# Allegro board Power_Transformer.brd
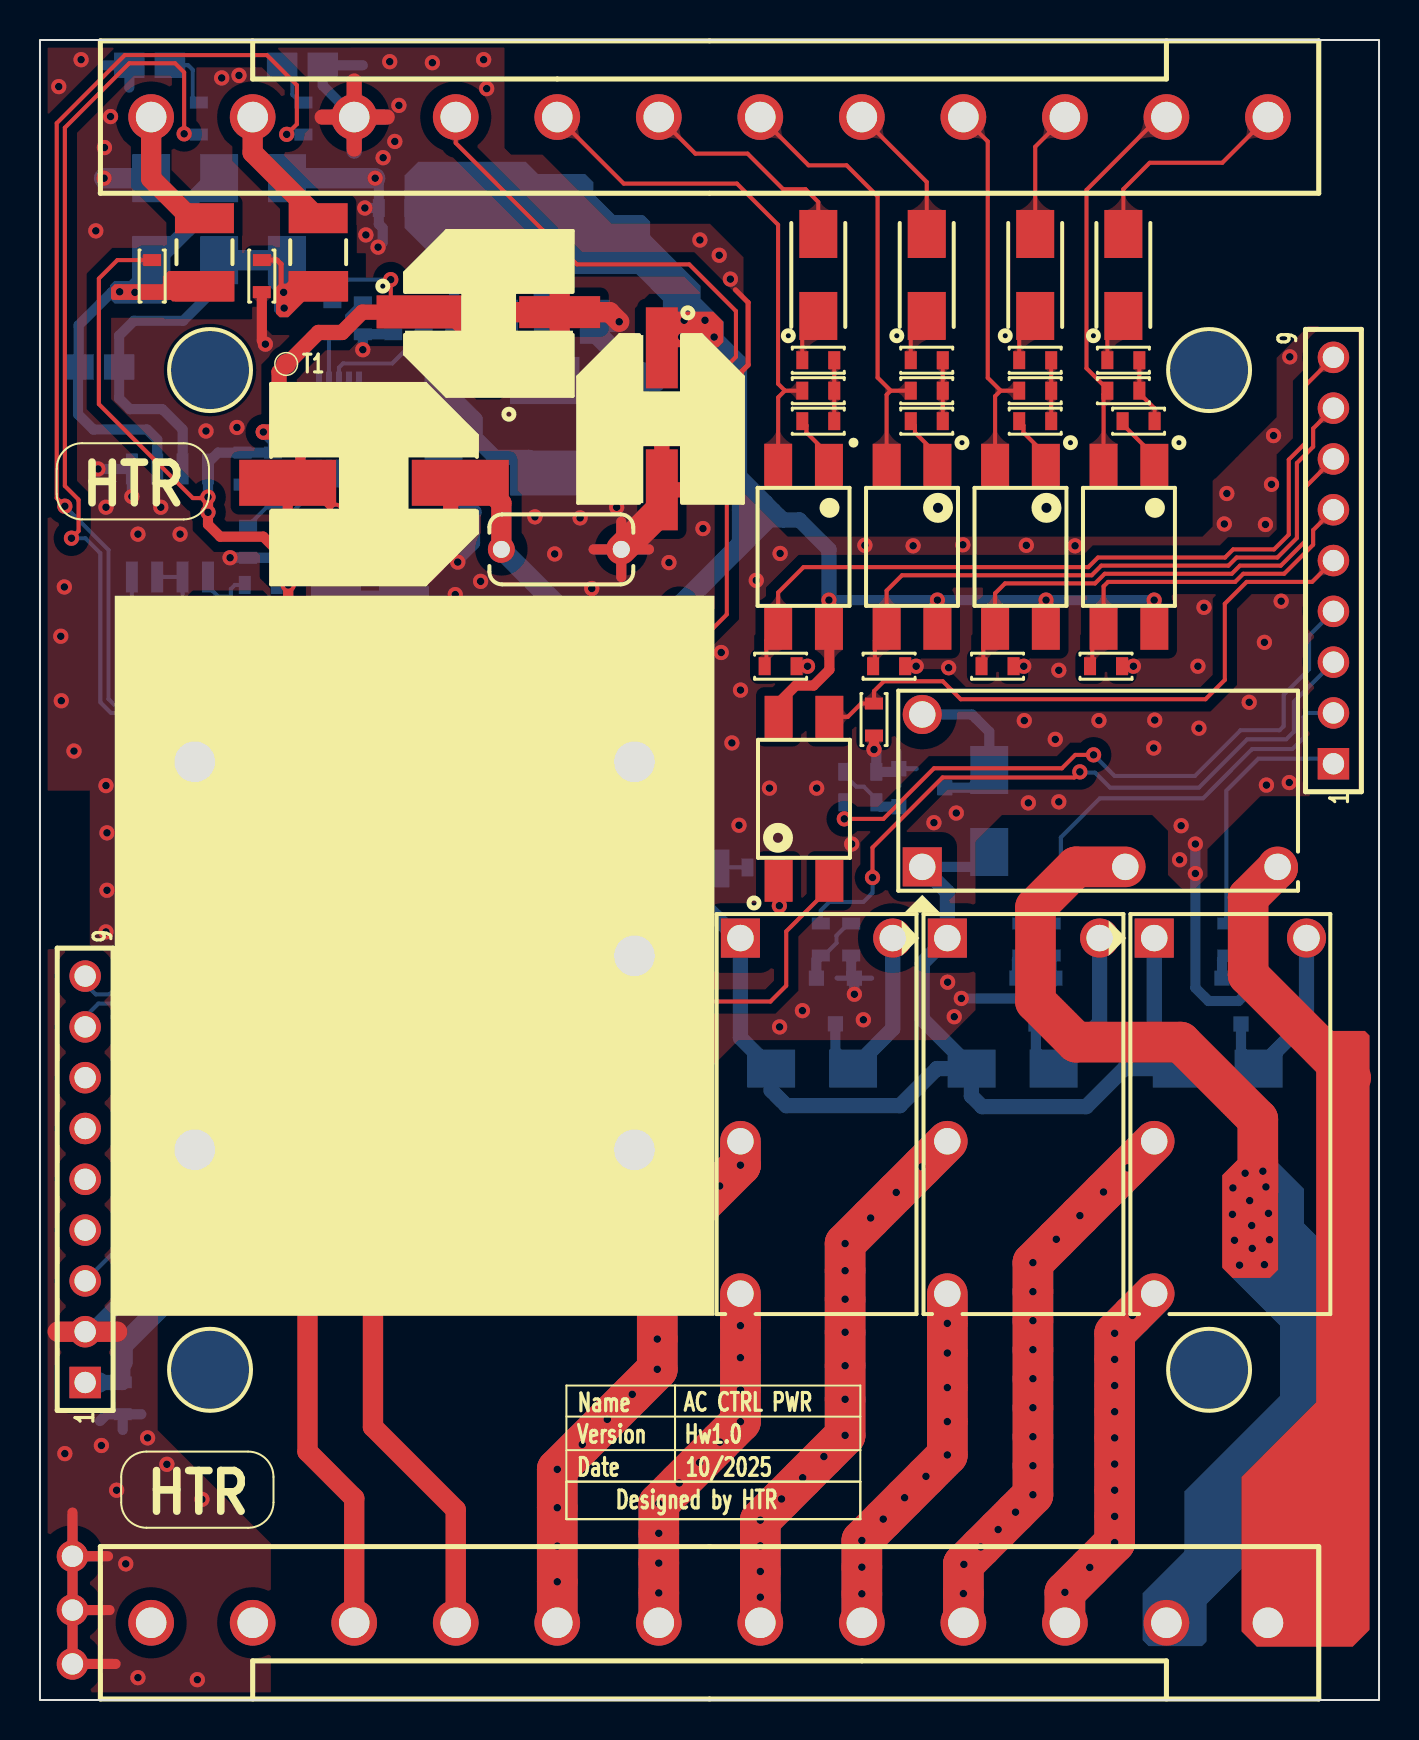
[diagram p0: board, top side]
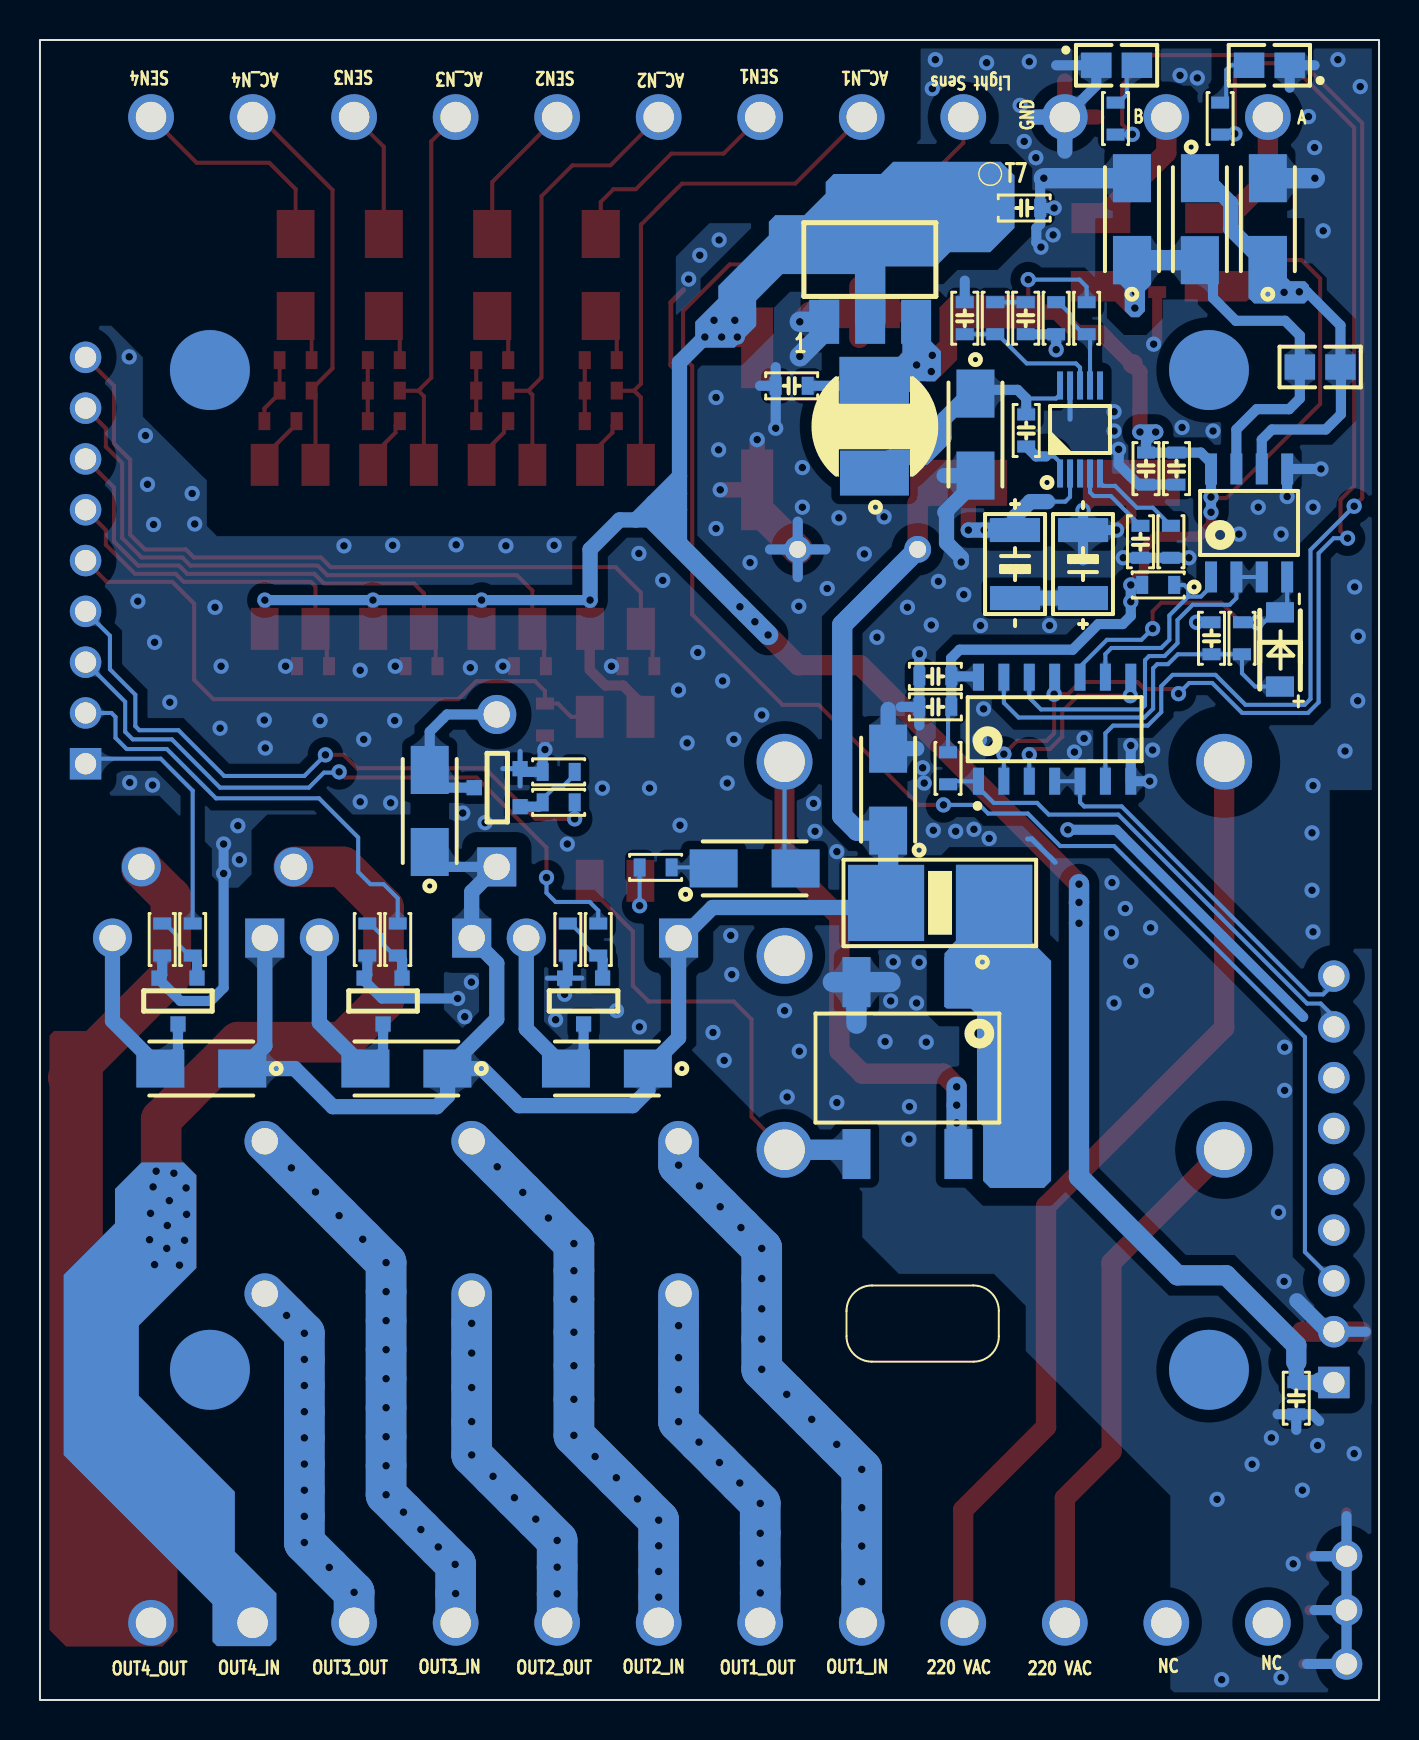
[diagram p1: board, bottom side, seen from below]

Outline 67 x 83 mm; copper layers: TOP, BOTTOM. Coordinates in mm from the lower left corner of the outline.
Outline path: rectangle 0,0 67,83

## Design rules (mm)
constraint set DEFAULT: min track width 0.203
nets with their own width: min track width 0.254; nets GND

## Placement (name value [footprint] x y rotation side)
C1  0.1uF  [C0603]  17.65 63.47 90 bottom
C2  470uF  [RAD_SIZE_F]  22.45 69.39 0 top
C3  4.7uF  [C1210]  18.21 58.5 270 bottom
C4  0.1uF  [CAP104J100V]  26.09 57.53 0 top
C5  220uF  [CASE_G]  16.71 60.86 180 top
C6  22pF  [C0603]  20.73 69.09 90 bottom
C7  0.1uF  [C0603]  11.94 57.91 270 bottom
C8  4.7uF  [C1210]  14.81 55.1 90 bottom
C9  0.1uF  [C0603]  17.68 69.09 270 bottom
C10  0.1uF  [C0603]  29.39 65.71 0 bottom
C11  0.1uF  [C0603]  17.75 74.6 180 bottom
C12  470uF  [RAD_SIZE_F]  31.11 64.06 270 top
C13  0.1uF  [C0603]  10.13 61.57 270 bottom
C14  1uF  [C0603]  11.66 61.57 270 bottom
C15  33pF  [C0603]  8.38 53.09 90 bottom
C16  0.1uF  [C0603]  22.2 51.18 0 bottom
C17  1uF  [C0603]  22.2 49.66 0 bottom
C18  0.1uF  [C0603]  4.14 15.09 270 bottom
D1  DB107S  [DB_1S]  23.6 31.6 270 bottom
D2  RB050L  [DO_214AC]  20.19 63.27 270 bottom
D3  1N4007WDITR  [DO_214AC]  31.24 41.58 180 bottom
D4  1N4007WDITR  [DO_214AC]  38.63 31.57 0 bottom
D5  1N4007WDITR  [DO_214AC]  48.67 31.57 0 bottom
D6  1N4007WDITR  [DO_214AC]  58.93 31.57 0 bottom
D7  1N4007WDITR  [DO_214AC]  47.5 44.45 90 bottom
D8  US1J  [DO_214AC]  38.94 71.25 90 top
D9  US1J  [DO_214AC]  44.37 71.25 90 top
D10  US1J  [DO_214AC]  49.8 71.25 90 top
D11  US1J  [DO_214AC]  54.21 71.25 90 top
D12  1N4148  [SOD_123]  4.95 52.53 90 bottom
D13  0805  [D0805]  13.13 81.74 270 bottom
D14  0805  [D0805]  5.49 81.74 90 bottom
D15  US1J  [DO_214AC]  12.36 74.04 90 bottom
D16  US1J  [DO_214AC]  5.56 74.04 90 bottom
D17  US1J  [DO_214AC]  8.96 74.04 270 bottom
DZ1  24V  [DO_214]  24.56 45.52 90 bottom
F1  0ZCH0050FF2G  [R1210]  8.23 72.39 90 top
F2  0ZCH0050FF2G  [R1210]  13.92 72.39 90 top
J1  Domino12PinRA  [DOMINO12_200]  33.5 3.86 270 top
J2  Domino12PinRA  [DOMINO12_200]  33.5 79.15 90 top
J3  -  [HEADER1X9]  2.26 15.88 90 top
J6  -  [HEADER1X9]  64.72 46.81 90 top
L1  6.8uH  [CHOKESIZE6MM]  25.25 63.68 90 bottom
NOREF  -  []  2 38 90 top
NOREF#2  -  []  0 45 90 top
NOREF#3  -  [unnamed#2]  58.5 66.5 0 top
NOREF#4  -  []  0 0 90 top
NOREF#5  -  [unnamed#2]  8.51 16.51 0 top
NOREF#6  -  [unnamed#2]  58.5 16.51 0 top
NOREF#7  -  [unnamed#2]  8.51 66.5 0 top
NOREF#8  -  []  0 0 0 top
Q1  MMBT2222  [SOT_23]  38.85 36.09 0 bottom
Q2  MMBT2222  [SOT_23]  48.88 36.09 0 bottom
Q3  MMBT2222  [SOT_23]  59.14 36.09 0 bottom
Q4  MMBT2222  [SOT_23]  42.98 44.67 90 bottom
R1  680k  [R0603]  19.2 69.09 90 bottom
R2  150K  [R0603]  10.41 57.91 270 bottom
R3  56K  [R0603]  14.63 69.09 270 bottom
R4  10K  [R0603]  16.15 69.09 270 bottom
R5  22K  [R0603]  36.2 41.63 0 bottom
R6  10K  [R0603]  41.73 49.02 270 top
R7  2.2K  [R0603]  39.07 38.02 270 bottom
R8  10K  [R0603]  40.59 38.02 270 bottom
R9  2.2K  [R0603]  49.1 38.02 270 bottom
R10  10K  [R0603]  50.62 38.02 270 bottom
R11  2.2K  [R0603]  59.36 38.02 270 bottom
R12  10K  [R0603]  60.88 38.02 270 bottom
R13  2.2K  [R0603]  41.05 44.88 0 bottom
R14  10K  [R0603]  41.05 46.41 0 bottom
R15  150K  [R0603]  38.94 66.99 0 top
R16  470  [R0603]  38.94 63.94 0 top
R17  10K  [R0603]  38.94 65.47 0 top
R18  10K  [R0603]  37.06 51.69 180 top
R19  150K  [R0603]  44.37 66.99 0 top
R20  470  [R0603]  44.37 63.94 0 top
R21  10K  [R0603]  44.37 65.47 0 top
R22  10K  [R0603]  42.49 51.69 180 top
R23  150K  [R0603]  49.8 66.99 0 top
R24  470  [R0603]  49.8 63.94 0 top
R25  10K  [R0603]  49.8 65.47 0 top
R26  10K  [R0603]  47.91 51.69 180 top
R27  150K  [R0603]  54.21 66.99 0 top
R28  470  [R0603]  54.97 63.94 0 top
R29  10K  [R0603]  54.21 65.47 0 top
R30  10K  [R0603]  53.34 51.69 180 top
R31  10K  [R0603]  11.05 55.75 180 bottom
R32  10K  [R0603]  5.61 71.2 270 top
R33  56K  [R0603]  6.86 53.09 90 bottom
R34  2.2K  [R0603]  7.95 79.07 90 bottom
R35  2.2K  [R0603]  13.18 79.07 90 bottom
R36  10K  [R0603]  21.56 46.58 270 bottom
R37  10K  [R0603]  11.1 71.2 270 top
R38  120  [R0805]  2.95 66.65 270 bottom
R39  0.01  [R2512]  21.97 39.85 0 bottom
RE1  ALQ324  [RELAY_SPST_20MX10MX10M]  38.86 29.21 270 top
RE2  ALQ324  [RELAY_SPST_20MX10MX10M]  49.21 29.21 270 top
RE3  ALQ324  [RELAY_SPST_20MX10MX10M]  59.56 29.21 270 top
RE4  ALQ324  [RELAY_SPST_20MX10MX10M]  53.04 45.47 0 top
T1  5V  [TESTPOINT_SIG]  12.32 66.8 0 top
T2  Test_Point_Pwr  [TEST_POINT_PWR]  1.63 1.8 0 top
T3  Test_Point_Pwr  [TEST_POINT_PWR]  1.63 4.5 0 top
T4  Test_Point_Pwr  [TEST_POINT_PWR]  1.63 7.19 0 top
T7  3.3V  [TESTPOINT_SIG]  19.46 76.3 180 bottom
U1  TPS5401DGQR  [MSOP-POWERPAD_10PIN]  14.96 63.53 90 bottom
U2  12VAC  [ZN35135BA_220V24V]  18.75 37.21 0 top
U3  PC817  [SOT254P900X350-4N]  38.23 45.06 90 top
U4  AMS1117-3V3  [SOT_223_3]  27.76 68.91 180 bottom
U5  PC817  [SOT254P900X350-4N]  38.21 57.66 270 top
U6  PC817  [SOT254P900X350-4N]  43.63 57.66 270 top
U7  PC817  [SOT254P900X350-4N]  49.06 57.66 270 top
U8  PC817  [SOT254P900X350-4N]  54.49 57.66 270 top
U9  SN75176B  [SOIC8]  6.5 58.85 90 bottom
U10  74HC04D  [SOIC_14]  16.23 48.54 90 bottom

## Library data of the parts
C1 C6 C7 C9-C11 C13-C18 = NPOL_CAP: User Part Number: ***
C2 C5 C12 = POL_CAP
C3 C4 C8 = NPOL_CAP
D1 = DIODE_BRIDGE
D2-D11 D15-D17 = DIODE_AC
D12 = DIODE
D13 D14 = LED
DZ1 = ZENER
F1 F2 = Fuse
J1 J2 = HEADER1X12
J3 J6 = HEADER1X9
L1 = IND_FERRITE
Q1-Q4 = BJT_NPN
R1-R37 = RES: User Part Number: ***
R38 R39 = RES
RE1-RE4 = RELAY_24V_MINI_0
T1-T4 T7 = TestPoint
U1 = TPS5401
U2 = ZN35150BA_0: User Part Number: ***; Tolerance: ***
U3 U5-U8 = PC817
U4 = LM1117X_4P
U9 = SN65176_2
U10 = 74HC04

## Footprints (pads in the part's own frame, mm; a bottom-side part is the same pattern mirrored in y, then rotated)
C0603
  rect 0.6x0.9 smd: 1(-0.8,0) 2(0.8,0)
C1210
  rect 1.2x2.5 smd: 1(0,0) 2(3.4,0)
CAP104J100V
  round 1.35 hole 0.85: 1(-3,0) 2(3,0)
CASE_G
  rect 4.85x2.3 smd: 1(-4.318,0) 2(4.318,0)
CHOKESIZE6MM
  rect 2.25x3.45 smd: 1(-2.33,0) 2(2.33,0)
D0805
  rect 1.27x1.524 smd: 1(0,1.016) 2(0,-1.016)
DB_1S
  rect 2.5x1.4 smd: 1(-4.3,2.55) 2(-4.3,-2.55) 3(4.3,-2.55) 4(4.3,2.55)
DO_214
  rect 2.4x1.9 smd: 1(2.05,0) 2(-2.05,0)
DO_214AC
  rect 2.4x1.9 smd: A(2.05,0) C(-2.05,0)
DOMINO12_200
  round 2.286 hole 1.524: 1(0,27.94) 2(0,22.86) 3(0,17.78) 4(0,12.7) 5(0,7.62) 6(0,2.54) 7(0,-2.54) 8(0,-7.62) 9(0,-12.7) 10(0,-17.78) 11(0,-22.86) 12(0,-27.94)
HEADER1X9
  rect 1.575x1.575 hole 1.067: 1(0,0)
  round 1.575 hole 1.067: 2(2.54,0) 3(5.08,0) 4(7.62,0) 5(10.16,0) 6(12.7,0) 7(15.24,0) 8(17.78,0) 9(20.32,0)
MSOP-POWERPAD_10PIN
  rect 1.4x0.3 smd: 1(-2.2,1) 2(-2.2,0.5) 3(-2.2,0) 4(-2.2,-0.5) 5(-2.2,-1) 6(2.2,-1) 7(2.2,-0.5) 8(2.2,0) 9(2.2,0.5) 10(2.2,1)
R0603
  rect 0.6x0.9 smd: 1(-0.8,0) 2(0.8,0)
R0805
  rect 1.27x1.524 smd: 1(0,1.016) 2(0,-1.016)
R1210
  rect 1.5x2.95 smd: 1(-1.7,0) 2(1.7,0)
R2512
  rect 3.81x3.81 smd: 1(-2.7,0) 2(2.7,0)
RAD_SIZE_F
  rect 4.05x1.6 smd: 1(-3.55,0) 2(3.55,0)
RELAY_SPST_20MX10MX10M
  rect 1.956x1.956 hole 1.321: 1(-8.89,-3.81)
  round 1.956 hole 1.321: 2(-8.89,3.81) 3(1.27,-3.81) 4(8.89,-3.81)
SOD_123
  rect 1.016x1.397 smd: 1(-1.854,0) 2(1.854,0)
SOIC8
  rect 1.55x0.6 smd: 1(-2.7,1.905) 2(-2.7,0.635) 3(-2.7,-0.635) 4(-2.7,-1.905) 5(2.7,-1.905) 6(2.7,-0.635) 7(2.7,0.635) 8(2.7,1.905)
SOIC_14
  rect 1.35x0.55 smd: 1(-2.6,3.81) 2(-2.6,2.54) 3(-2.6,1.27) 4(-2.6,0) 5(-2.6,-1.27) 6(-2.6,-2.54) 7(-2.6,-3.81) 8(2.6,-3.81) 9(2.6,-2.54) 10(2.6,-1.27) 11(2.6,0) 12(2.6,1.27) 13(2.6,2.54) 14(2.6,3.81)
SOT254P900X350-4N
  rect 2.1x1.4 smd: 1(-4.1,1.27) 2(-4.1,-1.27) 3(4.1,-1.27) 4(4.1,1.27)
SOT_23
  rect 0.762x0.762 smd: 1(0,0) 2(1.9,0) 3(0.95,2.291)
SOT_223_3
  rect 1.5x2.2 smd: 1(0,0) 2(2.3,0) 3(4.6,0)
  rect 3.81x2.007 smd: 4(2.3,6.3)
TEST_POINT_PWR
  round 1.575 hole 1.067: 1(0,0)
TESTPOINT_SIG
  round 1 smd: 1(0,0)
unnamed#2
  round 0 hole 3.2: (0,0)
ZN35135BA_220V24V
  round 2.794 hole 2.032: 1(-11,9.7) 2(-11,-9.7) 3(11,9.7) 4(11,0) 5(11,-9.7)

## Nets
12VAC1: D1.4 D3.A U2.3
12VAC2: D1.3 U2.5 U3.2
24V: C3.1 C4.1 C5.1 D4.C(CATHODE) D5.C(CATHODE) D6.C(CATHODE) D7.C(CATHODE) DZ1.2(CATHODE) R39.2 RE1.1 RE2.1 RE3.1 RE4.1 U1.2
+3.3V: C11.1 C12.1 C18.1 J3.1 T7.1(T) U3.4 U4.2 U4.4(OUT_PAD) U5.4 U6.4 U7.4 U8.4
+5V: C2.1 C10.1 C13.1 C14.1 C16.1 C17.1 L1.2 R3.1 R31.1 R32.1 R36.1 T1.1(T) U4.3 U9.8(VCC) U10.14
GND: C2.2 C4.2 C5.2 C6.2 C7.2 C8.2 C9.2 C10.2 C11.2 C12.2 C13.2 C14.2 C15.2 C16.2 C17.2 C18.2 D1.2(AC2) D2.A D13.2(CATHODE) D14.2(CATHODE) D15.A D16.A DZ1.1 J2.3 J3.2 Q1.2 Q2.2 Q3.2 Q4.2 R2.2 R4.2 R6.2 R8.2 R10.2 R12.2 R14.2 R18.1 R22.1 R26.1 R30.1 R37.2 T2.1(T) T3.1(T) T4.1(T) U1.9 U4.1 U9.5 U10.7
AC1: J1.9 U2.1
AC2: J1.10 U2.2(N)
AC_N1: J2.5 R17.1 U5.2
AC_N2: J2.7 R21.1 U6.2
AC_N3: J2.9 R25.1 U7.2
AC_N4: J2.11 R29.1 U8.2
D: J3.8 R36.2 U10.1
IO0: J3.4
IO1: J3.5
LIGHT_SENSOR: J2.4 J3.3
OUT_SEN1: J6.9 R18.2 U5.3(EMITTER)
OUT_SEN2: J6.8 R22.2 U6.3(EMITTER)
OUT_SEN3: J6.7 R26.2 U7.3(EMITTER)
OUT_SEN4: J6.6 R30.2 U8.3(EMITTER)
R: J3.9 U10.4 U10.5
RELAY1: J6.3 R7.1
RELAY2: J6.2 R9.1
RELAY3: J6.1 R11.1
RELAY4: J6.4 R13.1
RS485_A: F1.2 J2.1
RS485_B: F2.2 J2.2
SEN1: D8.A J2.6
SEN2: D9.A J2.8
SEN3: D10.A J2.10
SEN4: D11.A J2.12
UART_RX: J3.7
UART_TX: J3.6
ZDET: J6.5 R6.1 U3.3(EMITTER)
N15608178: C1.1 U1.1
N15608186: C1.2 D2.C(CATHODE) L1.1 U1.10
N15608314: D1.1 R39.1
N15608376: C6.1 R1.1 U1.8
N15608388: C7.1 U1.4
N15608396: R3.2 R4.1 U1.7(VSENSE)
N15608468: R2.1 U1.5
N15608536: C3.2 C8.1
N15608594: C9.1 R1.2
N15608846: D3.C(CATHODE) R5.1
N15608872: R5.2 U3.1
N15609962: D4.A Q1.3(E) RE1.2(DC-)
N15610018: Q1.1 R7.2 R8.1
N15610242: D5.A Q2.3(E) RE2.2(DC-)
N15610294: Q2.1 R9.2 R10.1
N15610510: D6.A Q3.3(E) RE3.2(DC-)
N15610562: Q3.1 R11.2 R12.1
N15610779: D7.A Q4.3(E) RE4.2(DC-)
N15610831: Q4.1 R13.2 R14.1
N15611575: J1.8 RE1.3
N15611587: J1.7 RE1.4
N15611599: J1.6 RE2.3
N15611611: J1.5 RE2.4
N15611623: J1.4 RE3.3
N15611635: J1.3 RE3.4
N15611647: J1.2 RE4.3
N15611659: J1.1 RE4.4
N15613851: R15.2 R16.2 R17.2
N15613859: R16.1 U5.1
N15614021: R19.2 R20.2 R21.2
N15614029: R20.1 U6.1
N15614191: R23.2 R24.2 R25.2
N15614199: R24.1 U7.1
N15614361: R27.2 R28.2 R29.2
N15614369: R28.1 U8.1
N15619432: R34.1 U10.2 U10.11
N15619436: U10.3 U10.8
N15619731: U9.2 U9.3 U10.12(Y)
N15619740: R31.2 U9.1 U10.9
N15619823: D12.2(CATHODE) R33.2 U9.4 U10.10
N15620506: C15.1 D12.1 R33.1 U10.13
N15622225: R35.1 U10.6
N15622649: D16.C(CATHODE) D17.C(CATHODE) F1.1 R32.2 R38.1 U9.6
N15622671: D15.C(CATHODE) D17.A F2.1 R37.1 R38.2 U9.7
N156137971: D8.C(CATHODE) R15.1
N156139671: D9.C(CATHODE) R19.1
N156141371: D10.C(CATHODE) R23.1
N156143071: D11.C(CATHODE) R27.1
N156212371: D14.1 R34.2
N156222191: D13.1 R35.2

Pads without a net: J1 11 12; U1 3 6; U2 4

## Via types
v1: diameter 0.762, hole 0.381, TOP to BOTTOM, 334 vias

## Routing (per net, layer and track width the routed paths; a pad name or vN(x,y) marks a point on that pad's centre or on a via; arc(x,y) is an arc through that point)
12VAC1: length 33
  TOP w1.016: U2.3 29.75,41.91 27,39.17 27,32.46 25.86,31.32 21.79,31.32 v1(21.13,30.66) v1(21.13,29.74) v1(21.13,28.85)
  BOTTOM w0.203: U2.3 29.75,42.13 D3.A
  BOTTOM w1.016: D1.4 21.13,27.38 v1(21.13,28.85) v1(21.13,29.74) v1(21.13,30.66)
12VAC2: length 23.7
  TOP w0.203: U2.5 31.39,29.16 31.39,34.04 32.28,34.92 36.55,34.92 37.34,35.71 37.34,38.43 39.5,40.59 U3.2
  BOTTOM w1.016: D1.3 26.36,27.51 U2.5
24V: length 102.6
  TOP w0.762: C5.1 20.55,60.38 v1(20.55,58.5) v1(19.76,58.5)
  TOP w1.016: C5.1 22.07,60.86 23.09,59.84 C4.1
  BOTTOM w0.203: 16.59,59.92 15.7,59.92 15.46,60.16 U1.2
  BOTTOM w0.508: RE4.1 46.75,41.66 D7.C
  BOTTOM w0.762: D5.C 44.15,34.04 44.15,36.84 RE2.1 45.4,40.4 RE4.1 ; D5.C 44.88,31.57 43.03,29.72 37.35,29.72 36.58,30.48 D4.C 35.05,33.11 RE1.1 34.88,38.1 33.35,39.62 24.89,39.62 R39.2 ; D5.C 46.6,31.56 46.6,30.21 47.14,29.67 52.35,29.67 54.25,31.57 D6.C 55.75,32.7 RE3.1 ; v1(20.55,58.5) v1(19.76,58.5) C3.1 18.21,59.16 17.45,59.92 16.59,59.92
  BOTTOM w1.016: C4.1 26.86,53.76 26.86,44.21 26.12,43.47 DZ1.2 24.56,39.96 R39.2
+3.3V: length 137.3
  TOP w0.203: v1(55.75,55) 55.75,53.57 U8.4 ; v1(50.34,55) 50.34,53.57 U7.4 ; v1(44.9,55) 44.9,53.56 U6.4
  TOP w0.508: U6.4 44.9,55 v1(44.9,55) ; v1(50.34,55) 50.33,54.99 U7.4 ; v1(55.75,55) 55.76,54.99 U8.4 ; U3.4 36.96,49.86 37.82,50.72 38.71,50.72 39.5,51.51 39.5,53.54 U5.4 v1(39.48,55)
  TOP w0.762: v1(33.73,68.15) v1(32.89,68.15) v1(32.11,68.15) 31.65,68.15 C12.1
  TOP w1.016: v1(31.98,54.66) v1(31.23,53.91) v1(30.57,53.25) 29.06,51.74 25.96,51.74 v1(15.01,40.79) v1(15.01,39.88) v1(15.01,38.84)
  BOTTOM w0.508: C11.1 19.23,74.6 ; v1(39.48,55) v1(44.9,55) v1(50.34,55) v1(55.75,55) ; U4.4 25.26,75.41 21.37,75.41
  BOTTOM w0.762: 35,59.51 35,57.68 ; 35,59.51 35,60.33 ; 35,59.51 35.51,59 36.32,59 ; 37.19,59 38,59 39.48,57.53 v1(39.48,55) ; 37.19,59 36.32,59.87 ; 37.19,59 36.32,59 ; 35,61.19 35,60.33 ; 35,61.19 35,66.88 v1(33.73,68.15) v1(32.89,68.15) ; 35,61.19 36.32,59.87 ; 35,60.33 36.32,59 ; 36.32,59.87 36.32,59 ; 4.14,16.9 C18.1 4.13,15.88 2.95,15.88
  BOTTOM w1.016: v1(30.57,53.25) v1(31.23,53.91) v1(31.98,54.66) 36.32,59 ; J3.1 2.95,15.88 ; v1(15.01,40.79) v1(15.01,39.88) v1(15.01,38.84) 15.01,26.16 10.08,21.23 7.65,21.23 4.14,17.73 4.14,16.9
  BOTTOM w1.524: U4.2 U4.4
  vias: v1(32.23,68.99) v1(33.27,68.99)
+5V: length 79.9
  TOP w0.203: 17.75,69.39 17.55,69.6 v1(17.55,71.02) ; v1(8.41,60.15) 8.36,60.1 7.65,60.1 2.95,64.8 2.95,71.07 3.87,72 R32.1 ; 11.96,64.44 11.94,64.47 11.94,66.42 T1.1
  TOP w0.508: v1(12.42,54.91) v1(12.42,55.75) 11.76,56.41 11.76,57.58 11.18,58.17 9.02,58.17 8.41,58.78 v1(8.41,59.39) v1(8.41,60.15)
  TOP w0.762: C2.1 16.13,69.39 15.11,68.38 13.93,68.38 11.96,66.41 v1(11.96,63.4) v1(11.18,63.4)
  BOTTOM w0.203: C17.1 21.56,49.49 R36.1 ; v1(17.55,71.02) 14.99,71.02 14.63,70.66 R3.1 ; v1(12.42,55.75) R31.1
  BOTTOM w0.508: v1(11.96,63.4) 11.66,63.09 11.66,62.92 ; 11.66,62.92 v1(11.18,63.4) ; 11.66,62.92 C14.1 C13.1 8.92,62.37 8.41,61.86 U9.8 v1(8.41,60.15) v1(8.41,59.39) ; v1(12.42,55.75) v1(12.42,54.91) 12.42,54.2 12.83,53.8 14.05,53.8 15.33,52.51 20.99,52.51 21.41,52.09 21.41,51.19 C16.1 ; 25.25,65.5 25.46,65.71 C10.1 ; C16.1 20.08,51.18 U10.14 ; C16.1 C17.1
  BOTTOM w0.762: v1(11.18,63.4) v1(11.96,63.4)
  BOTTOM w1.016: 25.25,65.5 24.39,65.5 v1(23.14,66.75) 23.14,68.89 U4.3
  vias: v1(22.35,67.23) v1(22.4,66.42)
GND: length 212
  TOP w0.254: 35.1,59.92 35.1,66.42 35.43,66.75 35.43,69.88 34.8,70.51 ; 28.5,69.39 28.51,69.39
  TOP w0.508: 3.4,7.19 T4.1 ; T4.1 T3.1 ; T4.1 1.63,9.37 ; R37.2 11.1,67.97 v1(11.28,67.79) ; T3.1 T2.1 3.78,1.8 ; T3.1 3.48,4.5 ; R26.1 v1(49.23,51.69) ; C5.2 12.4,59.23 v1(13.13,58.5) ; C5.2 13.03,61.49 v1(13.03,62.53) ; C5.2 13.44,60.86 v1(14.81,59.48) ; R22.1 v1(43.84,51.69) ; C4.2 27.7,57.53 ; C4.2 30.47,57.53 ; C4.2 29.09,56.15 ; C4.2 29.09,58.91 ; R30.1 v1(54.71,51.69) ; R18.1 v1(38.4,51.69) ; R6.2 v1(41.73,47.52)
  TOP w0.762: J2.3 17.37,79.15 ; J2.3 15.72,80.95 ; J2.3 14.12,79.15 ; J2.3 15.72,77.55 ; v1(32.96,60.51) C12.2 v1(31.11,63.02)
  TOP w1.016: C2.2 28.5,69.39 v1(28.98,68.91) ; C2.2 26,70.68 ; C2.2 26,68.11 ; C2.2 23.5,69.39 ; 3.86,18.41 J3.2 0.89,18.41
  TOP w1.524: C12.2 31.11,59.56 C4.2
  BOTTOM w0.254: 16.21,41.88 17.37,43.05 17.58,43.05 ; D15.A 12.36,76.36 ; U1.9 15.46,64.04 ; 42.98,45.7 Q4.2 ; Q4.2 43.84,46.57 ; Q4.2 42.98,47.43 ; v1(9.09,81.1) 8.92,80.92 ; 41.61,36.09 Q1.2 39.89,36.09
  BOTTOM w0.508: v1(16.15,67.51) R4.2 C9.2 ; 3,13.94 3.34,14.29 C18.2 ; Q4.2 42.82,46.41 R14.2 41.85,47.41 v1(41.73,47.52) ; J3.2 0.66,18.41 ; 23.93,49.66 C17.2 ; C17.2 23,48.72 ; C17.2 C16.2 v1(23,52.31) ; C8.2 14.81,56.98 ; C8.2 v1(13.13,58.5) ; C8.2 v1(14.81,59.48) ; v1(16.92,72.64) 17.14,72.87 17.14,73.6 16.95,73.79 C11.2 ; v1(16.77,76.09) 16.95,75.91 C11.2 ; C11.2 v1(16.26,74.6) ; 1.63,9.19 T4.1 ; T4.1 T3.1 ; T4.1 3.23,7.19 ; v1(12.8,57.11) C7.2 R2.2 v1(9.51,57.11) ; C4.2 27.7,57.53 ; C4.2 30.47,57.53 ; C4.2 29.09,56.15 ; C4.2 29.09,58.91 ; J2.3 14.15,80.72 D13.2 16.15,81.74 ; v1(46.1,35.08) 49.89,35.08 50.78,35.97 Q2.2 50.62,36.25 R10.2 ; T3.1 T2.1 3.61,1.8 ; T3.1 3.23,4.5 ; C15.2 v1(9.13,53.89) ; C13.2 C14.2 12.03,60.77 13.03,61.77 v1(13.03,62.53) ; 3.8,34.15 13.15,43.51 v1(15.57,43.51) ; C18.2 5.07,14.29 ; C18.2 4.14,13.5 ; 3.23,81.74 D14.2 4.47,80.62 ; v1(40.75,35.29) Q1.2 40.59,36.25 R8.2 ; R12.2 60.88,36.25 Q3.2 61.04,36.02 59.97,34.95 58.47,34.95 57.81,35.61 v1(57.81,41.33) v1(57.81,42.8) ; v1(11.43,38.61) 11.38,38.61 ; C10.2 v1(30.19,63.59) ; C10.2 30.97,65.71 ; C10.2 30.19,66.64 ; C6.2 20.73,70.97 ; v1(11.47,45.94) U10.7 v1(12.42,47.73) ; v1(4.6,60.17) U9.5 v1(2.9,61.55)
  BOTTOM w0.762: v1(20.9,56.9) 20.9,57.12 21.64,57.86 21.64,59.31 21.72,59.39 20.19,60.91 D2.A 21.76,61.22 ; 17.18,79.15 J2.3 15.72,77.44 ; 24.56,49.53 DZ1.1 23.13,47.57 ; J3.2 2.57,18.41 4.11,19.96
  BOTTOM w1.016: D16.A v1(3.21,76.09) ; D1.2 27.33,35.9 ; D1.2 26.15,33.82 ; D1.2 24.44,35.9 ; D15.A v1(16.77,76.09) ; v1(28.98,67.18) 27.76,68.4 U4.1 v1(28.98,68.91)
  vias: v1(0.94,80.67) v1(1.04,53.19) v1(1.07,49.96) v1(1.22,55.65) v1(1.24,12.32) v1(1.7,47.45) v1(2.06,82.02) v1(2.79,73.46) v1(3.07,12.73) v1(3.23,77.62) v1(3.3,59.64) v1(3.3,45.72) v1(3.3,38.4) v1(3.35,43.36) v1(3.35,40.49) v1(3.53,79.17) v1(3.84,10.49) v1(4.29,6.81) v1(4.72,32.64) v1(4.72,30.48) v1(4.75,20.93) v1(4.9,58.29) v1(4.9,1.12) v1(5.03,24.38) v1(5.38,13.11) v1(6.05,59.64) v1(6.35,11.79) v1(7.01,58.29) v1(7.87,1.02) v1(8.1,10.03) v1(8.31,63.45) v1(9.86,63.63) v1(9.96,81.23) v1(11.33,47.5) v1(11.63,35.46) v1(12.42,36.93) v1(12.7,39.57) v1(13.26,64.41) v1(13.26,63.45) v1(13.26,34.85) v1(13.36,40.87) v1(13.39,38.35) v1(14.76,48.08) v1(15.24,47.4) v1(16.31,73.25) v1(16.48,53.72) v1(17.17,77.11) v1(17.5,81.92) v1(17.75,77.93) v1(17.96,79.73) v1(19.51,43.08) v1(19.63,81.86) v1(19.79,49.56) v1(19.94,53.72) v1(19.99,48.03) v1(20.27,43.54) v1(20.78,55.27) v1(21.18,43.43) v1(22.05,55.93) v1(22.2,82.02) v1(22.3,43.48) v1(22.35,80.57) v1(22.4,53.75) v1(22.66,32.89) v1(22.83,46.61) v1(22.76,45.85) v1(23.01,36.88) v1(23.14,34.85) v1(23.5,29.67) v1(23.52,28.04) v1(23.6,54.64) v1(24.31,36.91) v1(24.43,34.95) v1(24.71,32.92) v1(24.77,59.16) v1(25.12,53.14) v1(25.76,57.3) v1(27.03,59.11) v1(27.13,42.42) v1(27.13,29.87) v1(27.61,55.58) v1(28.22,43.43) v1(28.3,44.83) v1(28.85,61.62) v1(28.85,59.64) v1(29.03,54.69) v1(29.01,32.44) v1(29.62,30.15) v1(29.74,34.47) v1(30.89,49.25) v1(31.47,56.87) v1(32.28,48.03) v1(32.44,38.23) v1(32.38,36.27) v1(32.61,45.85) v1(32.84,50.95) v1(32.77,31.98) v1(33.02,73) v1(33.05,62.51) v1(33.17,65.13) v1(33.17,58.57) v1(33.32,33.38) v1(33.99,72.24) v1(34.09,52.37) v1(34.54,71.04) v1(34.62,47.85) v1(34.98,43.74) v1(35.05,50.5) v1(35.84,55.98) v1(36.5,45.59) v1(37.03,57.33) v1(37.01,33.66) v1(38.15,34.47) v1(38.86,45.59) v1(40.61,42.8) v1(41.2,34.01) v1(41.27,57.73) v1(43.69,57.71) v1(44.73,43.87) v1(45.42,35.89) v1(45.47,51.61) v1(45.75,34.16) v1(45.85,44.35) v1(46.18,57.76) v1(49.25,48.97) v1(49.35,57.73) v1(49.45,44.86) v1(50.8,48.03) v1(50.98,51.49) v1(50.98,44.91) v1(51.79,57.71) v1(52.98,48.97) v1(55.73,47.6) v1(55.78,49) v1(57.02,42.01) v1(57.1,43.71) v1(57.94,51.69) v1(57.99,48.59) v1(58.24,54.64) v1(59.26,58.8) v1(59.39,60.33) v1(60.5,49.89) v1(61.32,58.78) v1(61.26,52.88) v1(61.37,45.75) v1(61.62,60.78) v1(61.72,63.22) v1(62.1,54.94) v1(62.53,67.16) v1(62.51,45.87)
AC1: length 48.5
  TOP w1.016: J1.9 20.8,9.51 16.66,13.65 16.66,24.69 7.75,33.6 7.75,46.91 U2.1
AC2: length 27
  TOP w1.016: J1.10 15.72,10.08 13.39,12.42 13.39,21.87 U2.2
AC_N1: length 26.4
  TOP w0.203: 37.27,65.47 36.94,65.13 U5.2 ; 37.27,65.47 R17.1 ; 37.27,65.47 37.27,65.47 36.93,65.81 36.93,73.76 34.87,75.82 29.21,75.82 J2.5
AC_N2: length 22.3
  TOP w0.203: J2.7 38.46,76.73 40.36,76.73 41.91,75.18 41.91,66.12 42.57,65.47 ; U6.2 42.36,65.26 42.57,65.47 ; 42.57,65.47 R21.1
AC_N3: length 19.2
  TOP w0.203: 48.07,65.47 47.42,66.11 47.42,77.93 J2.9 ; 48.07,65.47 47.79,65.19 U7.2 ; 48.07,65.47 R25.1
AC_N4: length 19.8
  TOP w0.203: U8.2 53.22,65.28 R29.1 53.41,65.54 52.36,66.59 52.36,75.5 56.01,79.15 J2.11
D: length 24.9
  BOTTOM w0.203: R36.2 21.41,45.94 U10.1 20.04,45.62 19.28,44.86 17.11,44.86 16.53,44.27 13.05,44.27 3.6,34.82 2.92,34.82 2.26,34.16 J3.8
LIGHT_SENSOR: length 86.4
  TOP w0.203: v1(21.79,44.75) 23.04,44.75 28.04,49.76 29.84,49.76 34.37,54.28 34.37,66.7 34.82,67.16 34.82,69.44 32.49,71.78 26.87,71.78 20.8,77.85 J2.4
  BOTTOM w0.203: J3.3 3.71,22.4 3.71,33.15 13.26,42.7 15.95,42.7 17.58,44.32 19.56,44.32 19.99,44.75 v1(21.79,44.75)
OUT_SEN1: length 40.5
  TOP w0.203: J6.9 63.3,65.71 63.3,62.83 62.48,62.02 62.48,58.27 61.75,57.53 59.7,57.53 59.3,57.12 52.94,57.12 52.45,56.64 38.2,56.64 36.94,55.38 U5.3 36.35,52.97 36.35,51.78 R18.2
OUT_SEN2: length 32.9
  TOP w0.203: J6.8 63.7,63.58 63.7,62.66 62.89,61.85 62.89,58.1 61.92,57.12 59.87,57.12 59.46,56.72 53.1,56.72 52.62,56.24 43.13,56.24 42.36,55.47 U6.3 41.77,52.97 41.77,51.78 R22.2
OUT_SEN3: length 25.2
  TOP w0.203: J6.7 63.3,60.63 63.3,57.93 62.08,56.72 60.04,56.72 59.63,56.31 53.27,56.31 52.79,55.83 48.29,55.83 47.79,55.33 U7.3 47.2,52.97 47.2,51.78 R26.2
OUT_SEN4: length 17.8
  TOP w0.203: J6.6 63.7,58.5 63.7,57.76 62.25,56.31 60.21,56.31 59.8,55.91 53.44,55.91 53.22,55.68 U8.3 52.65,52.99 52.65,51.8 R30.2
R: length 19.6
  BOTTOM w0.203: J3.9 2.26,35.81 2.79,35.28 3.48,35.28 12.88,44.68 14.76,44.68 14.96,44.88 U10.5 U10.4
RELAY1: length 34.3
  TOP w0.203: v1(52.03,46.41) 51.75,46.13 45.16,46.13 41.66,42.62 v1(41.66,41.12)
  BOTTOM w0.203: R7.1 39.07,39.47 39.5,39.9 41.2,39.9 41.66,40.36 v1(41.66,41.12) ; v1(52.03,46.41) 52.07,46.37 52.79,46.37 53.54,45.62 57.99,45.62 60.4,48.03 62.36,48.03 62.74,48.41 62.74,49.91 J6.3
RELAY2: length 22.3
  BOTTOM w0.203: R9.1 49.1,40.08 49.81,40.79 50.47,40.79 51.08,41.4 51.08,43.13 53.04,45.09 58.19,45.09 60.66,47.55 62.66,47.55 63.22,48.11 63.22,49.15 63.42,49.35 J6.2
RELAY3: length 12.8
  BOTTOM w0.203: J6.1 64.47,47.07 60.96,47.07 59.36,45.47 R11.1
RELAY4: length 32.4
  TOP w0.203: v1(40.25,44.06) 42.2,44.06 44.73,46.58 51.13,46.58 51.8,47.26 v1(52.72,47.26)
  BOTTOM w0.203: v1(52.72,47.26) 53.77,46.2 57.78,46.2 60.07,48.49 62.03,48.49 62.23,48.69 62.23,50.27 63.5,51.54 63.5,53.21 J6.4 ; R13.1 v1(40.25,44.06)
RS485_A: length 6.6
  TOP w1.016: J2.1 5.56,76.07 7.55,74.09 F1.2
RS485_B: length 6.4
  TOP w1.016: J2.2 10.64,77.37 F2.2
SEN1: length 11.3
  TOP w0.203: D8.A 38.94,74.9 38.3,75.54 37.19,75.54 35.41,77.32 32.79,77.32 J2.6
SEN2: length 7.2
  TOP w0.203: J2.8 44.37,75.9 D9.A
SEN3: length 6.5
  TOP w0.203: J2.10 49.8,77.66 D10.A
SEN4: length 11
  TOP w0.203: J2.12 59.16,76.86 55.52,76.86 54.21,75.54 D11.A
ZDET: length 31.8
  TOP w0.203: U3.3 40.42,49.16 41.08,49.82 R6.1 41.73,50.44 42.22,50.93 45.17,50.93 46.07,50.04 58.32,50.04 59.28,51 59.28,54.81 60.38,55.91 63.65,55.91 J6.5
N15608178: length 2.6
  BOTTOM w0.203: U1.1 15.96,61.88 16.26,62.18 16.66,62.18
  BOTTOM w0.508: 16.66,62.18 17.16,62.18 C1.1
N15608186: length 13.1
  BOTTOM w0.203: U1.10 15.96,65.28 16.16,65.07 17.65,65.07
  BOTTOM w0.508: D2.C 20.01,65.51 18.08,65.51 17.65,65.07 C1.2
  BOTTOM w0.762: L1.1 24.47,62.13 22.76,62.13 21.77,63.12 21.77,64.04 20.49,65.32 D2.C
N15608314: length 4.7
  BOTTOM w1.016: D1.1 21.05,37.37 19.27,39.15 R39.1
N15608376: length 7.4
  BOTTOM w0.203: C6.1 R1.1 19.09,68.29 17.63,66.83 15.16,66.83 14.96,66.62 U1.8
N15608388: length 4.2
  BOTTOM w0.203: U1.4 14.46,60.38 14.27,60.2 13.42,60.2 C7.1
N15608396: length 5
  BOTTOM w0.203: U1.7 14.46,68.12 R3.2 14.77,68.29 15.37,68.88 15.37,69.22 16.04,69.89 R4.1
N15608468: length 4.9
  BOTTOM w0.203: U1.5 13.96,60.87 13.79,60.71 13.21,60.71 12.12,59.61 11.32,59.61 R2.1
N15608536: length 3.4
  BOTTOM w0.762: C3.2 C8.1
N15608594: length 1.5
  BOTTOM w0.203: C9.1 R1.2
N15608846: length 2.1
  BOTTOM w0.203: R5.1 33.34,41.63 D3.C
N15608872: length 3.2
  TOP w0.203: v1(37,39.71) 37,40.92 U3.1
  BOTTOM w0.203: R5.2 v1(37,39.71)
N15609962: length 9.9
  BOTTOM w0.508: D4.A 39.8,32.46 Q1.3
  BOTTOM w0.762: RE1.2 42.67,33.56 D4.A
N15610018: length 3.6
  BOTTOM w0.203: R8.1 40.45,38.82 39.85,38.23 39.85,37.85 39.23,37.22 R7.2
  BOTTOM w0.508: R7.2 38.85,37.01 Q1.1
N15610242: length 10.1
  BOTTOM w0.508: D5.A 49.83,32.46 Q2.3
  BOTTOM w0.762: D5.A 53.02,33.88 RE2.2
N15610294: length 3.6
  BOTTOM w0.203: R9.2 49.26,37.22 49.89,37.85 49.89,38.23 50.48,38.82 R10.1
  BOTTOM w0.508: Q2.1 48.88,37.01 R9.2
N15610510: length 10.1
  BOTTOM w0.508: D6.A 60.09,32.46 Q3.3
  BOTTOM w0.762: RE3.2 63.37,33.97 D6.A
N15610562: length 3.6
  BOTTOM w0.203: R11.2 59.52,37.22 60.15,37.85 60.15,38.23 60.74,38.82 R12.1
  BOTTOM w0.508: R11.2 59.14,37.01 Q3.1
N15610779: length 8.2
  BOTTOM w0.508: Q4.3 46.61,45.62 D7.A 47.5,48.41 46.63,49.28 RE4.2
N15610831: length 3.6
  BOTTOM w0.203: R13.2 41.85,45.05 41.22,45.67 40.84,45.67 40.25,46.27 R14.1
  BOTTOM w0.508: R13.2 42.06,44.67 Q4.1
N15611575: length 55.7
  TOP w2.032: RE1.3 v1(35.05,26.74) v1(30.89,22.58) v1(30.89,21.07) v1(30.89,19.56) v1(30.89,18.05) v1(30.89,16.54) v1(29.64,15.28) v1(28.38,14.03) v1(27.13,12.78) v1(25.88,11.53) v1(25.88,9.61) v1(25.88,7.7) v1(25.88,5.91) J1.8
  BOTTOM w2.032: RE1.3 v1(35.05,26.74) v1(34.01,25.7) v1(32.97,24.66) v1(31.93,23.62) v1(30.89,22.58) v1(30.89,21.07) v1(30.89,19.56) v1(30.89,18.05) v1(30.89,16.54) v1(29.64,15.28) v1(28.38,14.03) v1(27.13,12.78) v1(25.88,11.53) v1(25.88,9.61) v1(25.88,7.7) v1(25.88,5.91) J1.8
N15611587: length 36.3
  TOP w2.032: J1.7 v1(30.96,5.35) v1(30.96,6.85) v1(30.96,8.34) v1(30.96,9.83) v1(31.98,10.85) v1(33.01,11.87) v1(34.03,12.89) v1(35.05,13.91) v1(35.05,15.52) v1(35.05,17.12) v1(35.05,18.72) RE1.4
  BOTTOM w2.032: J1.7 v1(30.96,5.35) v1(30.96,6.85) v1(30.96,8.34) v1(30.96,9.83) v1(31.98,10.85) v1(33.01,11.87) v1(34.03,12.89) v1(35.05,13.91) v1(35.05,15.52) v1(35.05,17.12) v1(35.05,18.72) RE1.4
N15611599: length 55.9
  TOP w2.032: RE2.3 v1(44.12,26.66) v1(42.84,25.38) v1(41.56,24.1) v1(40.28,22.82) v1(40.28,21.46) v1(40.28,20.04) v1(40.28,18.39) v1(40.28,16.71) v1(40.28,15.04) v1(40.28,13.23) v1(39.22,12.17) v1(38.16,11.11) v1(37.1,10.05) v1(36.04,8.99) v1(36.04,7.71) v1(36.04,6.43) v1(36.04,5.14) J1.6
  BOTTOM w2.032: J1.6 v1(36.04,5.14) v1(36.04,6.43) v1(36.04,7.71) v1(36.04,8.99) v1(37.1,10.05) v1(38.16,11.11) v1(39.22,12.17) v1(40.28,13.23) v1(40.28,15.04) v1(40.28,16.71) v1(40.28,18.39) v1(40.28,20.04) v1(40.28,21.46) v1(40.28,22.82) v1(41.56,24.1) v1(42.84,25.38) v1(44.12,26.66) RE2.3
N15611611: length 36.5
  TOP w2.032: RE2.4 v1(45.4,18.83) v1(45.4,17.35) v1(45.4,15.62) v1(45.4,13.92) v1(45.4,12.25) v1(44.33,11.18) v1(43.26,10.11) v1(42.19,9.04) v1(41.12,7.98) v1(41.12,6.64) v1(41.12,5.31) J1.5
  BOTTOM w2.032: RE2.4 v1(45.4,18.83) v1(45.4,17.35) v1(45.4,15.62) v1(45.4,13.92) v1(45.4,12.25) v1(44.33,11.18) v1(43.26,10.11) v1(42.19,9.04) v1(41.12,7.98) v1(41.12,6.64) v1(41.12,5.31) J1.5
N15611623: length 56.1
  TOP w2.032: 46.2,6.78 v1(47.07,7.65) v1(47.94,8.52) v1(48.81,9.39) v1(49.68,10.26) v1(49.68,11.71) v1(49.68,13.16) v1(49.68,14.61) v1(49.68,16.06) v1(49.68,17.52) v1(49.68,18.97) v1(49.68,20.42) v1(49.68,21.87) v1(50.85,23.04) v1(52.03,24.22) v1(53.21,25.4) v1(54.42,26.61) RE3.3 ; 46.2,6.78 v1(46.2,5.32) J1.4 ; 46.2,6.78 v1(46.23,6.78)
  BOTTOM w2.032: RE3.3 v1(54.42,26.61) v1(53.21,25.4) v1(52.03,24.22) v1(50.85,23.04) v1(49.68,21.87) v1(49.68,20.42) v1(49.68,18.97) v1(49.68,17.52) v1(49.68,16.06) v1(49.68,14.61) v1(49.68,13.16) v1(49.68,11.71) v1(49.68,10.26) v1(48.81,9.39) v1(47.94,8.52) v1(47.07,7.65) 46.2,6.78 v1(46.2,5.32) J1.4
N15611635: length 36.6
  TOP w2.032: RE3.4 v1(54.66,19.23) v1(53.77,18.34) v1(53.77,17.03) v1(53.77,15.72) v1(53.77,14.41) v1(53.77,13.11) v1(53.77,11.8) v1(53.77,10.49) v1(53.77,9.18) v1(53.77,7.87) v1(52.53,6.63) v1(51.28,5.38) J1.3
  BOTTOM w2.032: RE3.4 v1(54.66,19.23) v1(53.77,18.34) v1(53.77,17.03) v1(53.77,15.72) v1(53.77,14.41) v1(53.77,13.11) v1(53.77,11.8) v1(53.77,10.49) v1(53.77,9.18) v1(53.77,7.87) v1(52.53,6.63) v1(51.28,5.38) J1.3
N15611647: length 27.3
  TOP w2.032: 60.93,25.37 60.93,29.03 57.07,32.89 51.84,32.89 49.81,34.92 49.81,39.62 51.84,41.66 RE4.3
  BOTTOM w2.032: J1.2 56.36,3.91
  vias: v1(59.69,25.6) v1(59.66,24.28) v1(59.77,22.99) v1(60.02,21.74) v1(60.3,26.34) v1(60.53,24.97) v1(60.63,23.72) v1(60.66,22.58) v1(61.19,26.44) v1(61.34,25.65) v1(61.26,21.77) v1(61.47,24.33) v1(61.52,23.01)
N15611659: length 13.3
  TOP w2.032: 65.58,31.11 60.45,36.25 60.45,40.13 61.93,41.61 RE4.4
N15613851: length 3
  TOP w0.203: R15.2 R17.2 R16.2
N15613859: length 2.7
  TOP w0.203: R16.1 38.35,63.73 38.35,63.37 39.48,62.25 U5.1
N15614021: length 3
  TOP w0.203: R20.2 R21.2 R19.2
N15614029: length 2.7
  TOP w0.203: U6.1 44.9,62.25 43.78,63.37 43.78,63.73 R20.1
N15614191: length 3
  TOP w0.203: R24.2 R25.2 R23.2
N15614199: length 2.7
  TOP w0.203: U7.1 50.33,62.25 49.21,63.37 49.21,63.73 R24.1
N15614361: length 3.4
  TOP w0.203: R28.2 55.77,64.58 55.01,65.34 R29.2 R27.2
N15614369: length 2.8
  TOP w0.203: U8.1 55.76,62.2 54.17,63.79 R28.1
N15619432: length 63.4
  TOP w0.203: v1(10.03,50.32) 10.26,50.55 11.73,50.55 12.09,50.9 14.95,50.9 15.56,50.29 v1(16.26,50.29) 16.26,48.34 16.64,47.96 18.11,47.96 v1(18.77,47.29) ; v1(7.21,78.31) 7.21,81.38 6.76,81.84 4.47,81.84 1.24,78.61 1.24,60.7 1.92,60.03 1.93,59.97 1.93,58.45 v1(1.57,58.09)
  BOTTOM w0.203: R34.1 7.91,78.31 v1(7.21,78.31) ; U10.2 v1(18.77,47.29) ; U10.11 16.26,51.11 v1(16.26,50.29) ; v1(10.03,50.32) 9.5,50.85 8.35,50.85 6.85,49.35 3.55,49.35 3.02,49.88 3.02,57.34 2.27,58.09 v1(1.57,58.09)
N15619436: length 9.3
  TOP w0.203: v1(17.5,47.27) 17.5,47.35 17.3,47.55 16.47,47.55 15.85,48.17 15.85,49.43 15.06,50.22 v1(12.45,50.22)
  BOTTOM w0.203: U10.3 v1(17.5,47.27) ; v1(12.45,50.22) 12.45,51.11 U10.8
N15619731: length 18.3
  BOTTOM w0.203: U9.3 U9.2 7.14,55.09 7.47,54.76 9.32,54.76 10.08,54 10.08,52.84 10.73,52.2 11.51,52.2 11.71,51.99 11.71,49.73 11.91,49.53 16.92,49.53 17.5,50.11 U10.12
N15619740: length 10.2
  BOTTOM w0.203: U9.1 8.41,55.68 8.92,55.17 9.55,55.17 ; 9.55,55.17 9.55,55.55 9.75,55.75 R31.2 ; 9.55,55.17 10.49,54.23 10.49,53.01 10.9,52.6 13.39,52.6 13.69,52.3 U10.9
N15619823: length 15.6
  TOP w0.203: v1(11.33,53.57) 11.33,54.43 10.9,54.86 7.9,54.86 6.91,53.87 v1(6.12,53.87)
  BOTTOM w0.203: U9.4 4.6,54.74 D12.2 5.26,54.38 5.77,53.87 v1(6.12,53.87) 6.85,53.87 R33.2 ; v1(11.33,53.57) 11.89,53.01 13.61,53.01 14.96,51.66 U10.10
N15620506: length 19.1
  BOTTOM w0.203: D12.1 6.2,50.67 6.86,51.33 R33.1 C15.1 10.06,52.29 10.56,51.79 11.1,51.79 11.3,51.59 11.3,49.56 11.74,49.12 18.03,49.12 18.77,49.86 U10.13
N15622225: length 62.8
  TOP w0.203: v1(1.24,59.69) 0.84,60.1 0.84,78.84 4.24,82.25 11.35,82.25 12.85,80.75 12.85,78.79 v1(12.34,78.28)
  BOTTOM w0.203: v1(1.24,59.69) 3.43,57.51 3.43,50.05 3.72,49.76 6.68,49.76 8.18,51.26 10.33,51.26 10.9,50.69 10.9,49.4 11.58,48.72 13.31,48.72 13.69,48.34 U10.6 ; R35.1 13.17,78.28 v1(12.34,78.28)
N15622649: length 19
  BOTTOM w0.508: U9.6 5.87,63.02 5.36,63.53 2.67,63.53 1.91,64.29 1.91,66.62 R38.1 1.93,68.73 3.61,70.41 v1(3.99,70.41)
  BOTTOM w0.762: D16.C 5.85,71.99 7.42,73.55 7.42,74.84 8.67,76.09 D17.C
  vias: v1(4.75,70.38)
N15622671: length 22.1
  TOP w0.254: v1(12.19,70.38) 12.06,70.51 12.06,71.79 11.86,72 R37.1
  BOTTOM w0.508: U9.7 7.14,63.53 6.12,64.54 4.5,64.54 3.96,65.07 R38.2 3.96,68.22 4.7,68.96 7.16,68.96 8.31,70.1 8.31,71.33 D17.A
  BOTTOM w1.016: D17.A D15.C
  vias: v1(12.22,69.6)
N156137971: length 2.5
  TOP w0.203: R15.1 38.14,68.4 D8.C
N156139671: length 2.5
  TOP w0.203: R19.1 43.57,68.4 D9.C
N156141371: length 2.5
  TOP w0.203: R23.1 49,68.4 D10.C
N156143071: length 2.5
  TOP w0.203: D11.C 53.41,68.4 R27.1
N156212371: length 3.1
  BOTTOM w0.203: R34.2 7.85,79.87 7.65,80.07 7.65,81.51 7.42,81.74 D14.1
N156222191: length 2.4
  BOTTOM w0.203: D13.1 12.62,81.23 12.62,80.26 13.02,79.87 R35.2

## Copper pours and planes (outline as drawn; the poured copper is in the pictures)
+3.3V on TOP (solid shape): 34.19,68.91 34.19,67.89 33.93,67.64 30.96,67.64 30.66,67.94 30.66,69.22 30.86,69.42 33.68,69.42
+3.3V on BOTTOM (solid shape): 24.92,76.3 27.28,76.3 27.69,75.9 27.69,75.31 28.75,74.24 30.2,74.24 30.53,73.91 30.53,73.23 33.06,70.7 33.06,70.07 34.21,68.91 34.21,67.89 33.93,67.61 32.26,67.61 31.17,68.71 31.17,69.98 29.84,71.3 25.73,71.3 25.35,71.68 22.17,71.68 21.46,72.39 19.46,72.39 18.24,73.61 18.24,76.23 18.92,76.91 24.31,76.91
+5V on TOP (solid shape): 22,69.62 22,67.92 22.3,67.61 23.65,67.61 23.95,67.31 23.95,66.34 23.7,66.09 22.83,66.09 22.66,65.91 22.2,65.91 21.11,67.01 21.11,68.12 20.65,68.58 16.84,68.58 16.84,70.23 21.39,70.23
+5V on BOTTOM (solid shape): 23.85,69.72 23.85,67.36 24.05,67.16 27,67.16 27,64.8 23.52,64.8 23.52,65.38 22.96,65.94 22.23,65.94 21.92,66.24 21.92,67.44 22.48,68 22.48,69.67 22.68,69.88 23.7,69.88
GND on TOP: 0.38,0.38 0.38,37.54 2.49,37.54 2.49,45.47 0.38,45.47 0.38,82.62 15.57,82.62 15.57,82.62 23.24,82.62 23.24,77.6 23.57,77.27 25.15,77.27 28.6,73.81 33.53,73.81 35.2,72.14 35.2,60.38 37.41,58.17 58.17,58.17 58.67,58.67 58.67,60.96 58.8,61.09 58.83,61.09 61.87,64.14 61.87,67.11 63.45,68.68 66.62,68.68 66.62,45.42 64.64,45.42 64.64,45.19 61.06,45.19 58.42,42.55 58.42,41.17 57.84,40.59 57.1,40.59 56.44,41.25 56.44,43.46 55.65,44.25 48.13,44.25 46.81,42.93 46.81,34.49 45.31,32.99 34.95,32.99 33.02,31.06 32.99,31.06 27.46,25.53 20.68,25.53 14.86,31.34 14.86,31.37 10.72,35.51 10.72,48.16 9.02,49.86 6.3,49.86 4.34,47.9 4.34,37.8 5.26,36.88 5.26,29.82 4.34,28.91 4.34,26.14 5.89,24.59 5.89,13.49 11.56,7.82 11.56,0.38 ; 8 cut-outs
GND on BOTTOM: 0.38,0.38 0.38,14.79 0.36,14.81 0.36,37.57 2.47,37.57 2.47,45.5 0.36,45.5 0.36,82.63 0.41,82.58 22.94,82.58 22.94,78.06 23.7,77.3 25.12,77.3 28.58,73.84 33.51,73.84 35.18,72.17 35.18,60.4 37.39,58.2 58.14,58.2 58.65,58.7 58.65,60.99 58.78,61.12 58.8,61.12 61.85,64.16 61.85,67.14 63.43,68.71 66.6,68.71 66.6,45.44 64.62,45.44 64.62,45.22 61.04,45.22 58.4,42.57 58.4,41.2 57.81,40.62 57.08,40.62 56.42,41.28 56.42,43.49 55.63,44.28 48.11,44.28 46.79,42.96 46.79,34.52 45.29,33.02 34.93,33.02 28.42,26.52 26.97,26.52 25.86,25.4 25.86,23.14 24.03,21.31 19.28,21.31 17.68,19.71 17.68,17.45 10.44,10.21 10.44,0.56 10.26,0.38 ; 23 cut-outs
N15608314 on BOTTOM (solid shape): 21.16,41.73 21.16,37.92 21.74,37.34 21.74,34.67 21.64,34.57 20.42,34.57 20.12,34.26 20.12,29.01 19.81,28.7 19.81,25.96 19.46,25.6 16.76,25.6 16.41,25.96 16.41,36.96 17.35,37.9 17.35,41.76 21.13,41.76
N15611647 on TOP (solid shape): 61.95,27.03 61.95,21.51 61.54,21.11 59.66,21.11 59.16,21.62 59.16,26.24 59.99,27.08 61.9,27.08
N15611647 on BOTTOM (solid shape): 63.25,25.55 63.25,23.83 65.81,21.26 65.81,12.24 58.37,4.8 58.37,2.92 58.14,2.69 55.47,2.69 55.17,3 55.17,5.33 57.25,7.42 57.25,10.41 62.05,15.21 62.05,18.72 59.18,21.59 59.18,26.24 59.82,26.87 61.93,26.87
N15611659 on TOP (solid shape): 66.52,33.22 66.52,3.51 65.68,2.67 60.88,2.67 60.12,3.43 60.12,11.15 63.86,14.88 63.86,33.15 64.16,33.45 66.29,33.45
N15622649 on TOP (solid shape): 9.73,69.93 6.63,69.93 6.55,70 3.63,70 3.56,70.08 3.56,70.61 3.73,70.79 6.12,70.79 6.15,70.82 6.15,71.17 6.43,71.45 9.73,71.45
N15622649 on BOTTOM (solid shape): 6.53,70.1 6.25,69.82 3.73,69.82 3.51,70.05 3.51,70.74 3.71,70.94 4.45,70.94 4.62,71.12 4.62,73.2 6.53,73.2
N15622671 on TOP (solid shape): 15.42,69.93 13.21,69.93 12.42,69.14 11.99,69.14 11.81,69.32 11.81,70.64 11.99,70.82 12.32,70.82 12.45,70.94 12.45,71.45 15.42,71.45
N15622671 on BOTTOM (solid shape): 13.31,70.79 12.95,70.79 12.73,70.56 12.73,69.47 12.4,69.14 12.01,69.14 11.71,69.44 11.71,70.46 11.4,70.76 11.4,73.2 13.31,73.2

Small or netless copper shapes (teardrops, artwork), in the pictures only: 126 on TOP, 213 on BOTTOM

## Text on the board
Ref Des/Silkscreen Bottom: A | NC | B | 220 VAC | OUT1_IN | OUT1_OUT | OUT2_IN | OUT2_OUT | OUT3_IN | OUT3_OUT | OUT4_IN | OUT4_OUT | Light Sens | AC_N1 | SEN1 | AC_N2 | SEN2 | AC_N3 | SEN3 | AC_N4 | SEN4 | GND
Ref Des/Silkscreen Top: Version | Date | Name | Designed by HTR | AC CTRL PWR | Hw1.0 | 10/2025 | HTR
COMPVAL_TYPE_BOTTOM: FIGURE | FINISHED_SIZE | 15.0 | 33.461 | 42.0 | 52.0 | 60.0 | 80.0 | 125.98 | DRILL CHART: TOP to BOTTOM | ALL UNITS ARE IN MILS | TOLERANCE_DRILL | +0.0/-0.0 | +3.0/-3.0 | PLATED | QTY | 334 | 2 | 19 | 16 | 24 | 5 | 4 | 406 | TOTAL HOLES:
